# Altium PCB AVL_Sim908_Version 7.PcbDoc
Units mil, origin at the board's own origin, x right, y up, seen from the top; angles counter-clockwise.
Board outline 9740 x 4995 mil, 2 copper layers (Top Layer, Bottom Layer); 81 components, 0 nets, 314 pads, 110 vias.
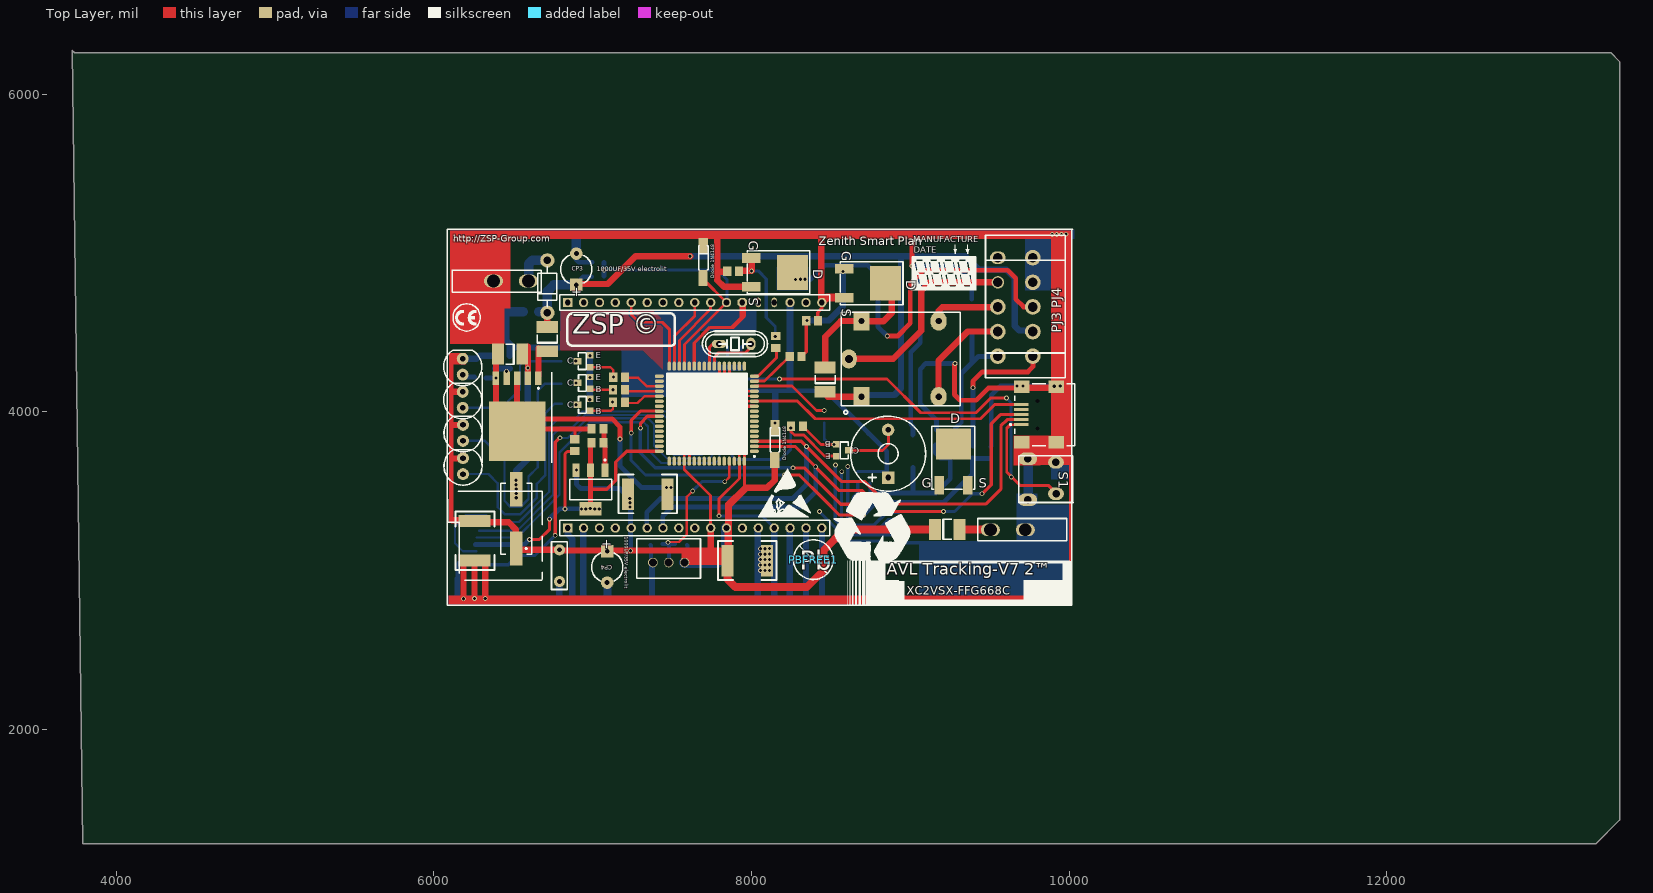
[diagram p0: Top Layer view]
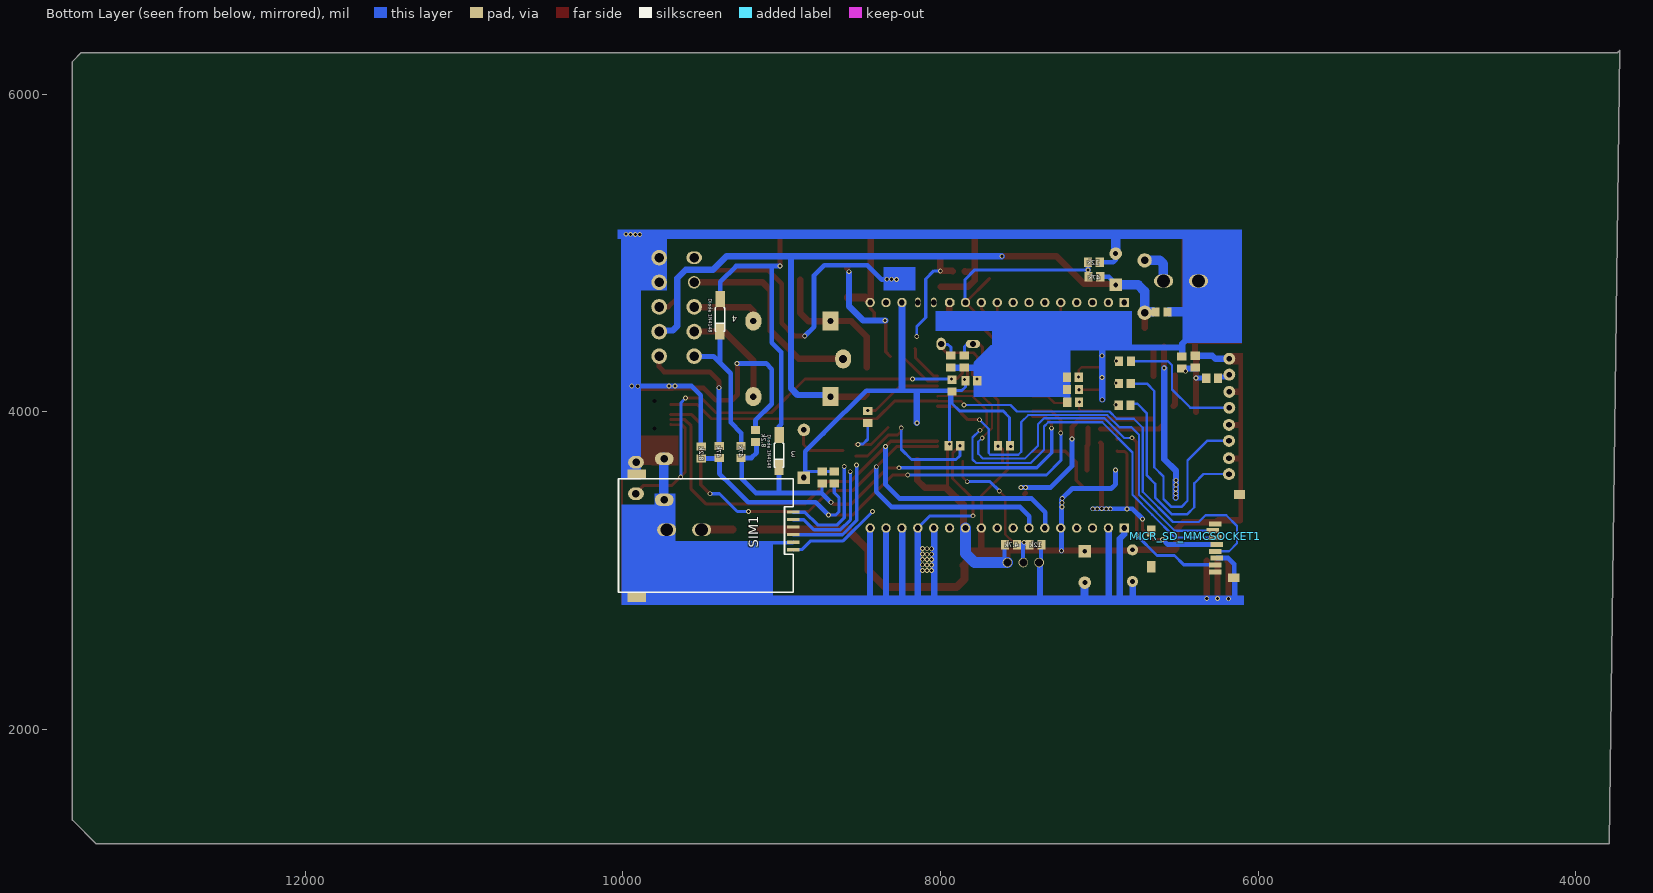
[diagram p1: Bottom Layer view, seen from below]

## Layer stack, top to bottom
Top Solder: solder mask 0.4, Solder Resist, Dk 3.5
Top Layer: signal copper 1.4
Dielectric1: dielectric 12.6, FR-4, Dk 4.8
Bottom Layer: signal copper 1.4
Bottom Solder: solder mask 0.4, Solder Resist, Dk 3.5

## Board outline
3725,6275 3740,6260 13410,6260 13465,6205 13465,1430 13315,1280 3790,1280

## Design rules (kind name [scope] priority, off if disabled: settings)
Clearance [All] p1: gap=10
PolygonConnect [All] p1: connectstyle=Relief reliefconductorwidth=10 reliefentries=4 polygonreliefangle="90 Angle" airgapwidth=10
RoutingVias [All] p1: holewidth=28 width=50 viastyle="Through Hole" minholewidth=28 minwidth=50 maxholewidth=28 maxwidth=50
SilkToSolderMaskClearance SilkscreenOverComponentPads [IsPad] p1: minsilkscreentomaskgap=10 clearancetoexposedcopper=TRUE
SolderMaskExpansion [All] p1: expansion=4
UnpouredPolygon [All] p1: allowunpoured=FALSE
Width [All] p1: maxlimit=10 minlimit=10 preferedwidth=10
28 further rules are at their usual default settings.

## Components (designator, comment, footprint, x,y, rotation, side; value= is the part's Value field where it differs from the comment)
3 "Diode 1N4148" D-SMD 9017,3726 r270 bottom (schematic designator D2)
4 "Diode 1N4148" D-SMD 9389,4581 r270 bottom (schematic designator D2)
CP3 "1000UF/35V electrolit" CAPPR5-5x5 6897,4897 r90 top (schematic designator CP2)
CP4 "1000UF/35V electrolit" CAPPR5-5x5 7092,3023 r270 top (schematic designator CP2)
D2 "Diode 1N4148" D-SMD 7697,4969 r90 top
D2 "Diode 1N4148" D-SMD 8148,3824 r90 top
MICR_SD_MMCSOCKET1 "" "PCBComponent_1 - duplicate" 6269,3295 r270 bottom locked
PBFREE1 "" LEAD_FREE_S 8389,3069 r0 top
PJ3 "PowerCon8" HDRB2*4#1 9771,4815 r270 top
PJ4 "PowerCon8" HDRB2*4#2 9771,4970 r270 top (schematic designator PJ3)
S1 "SW-PB" SW2 9917,3484 r270 top locked
SIM1 "SIMCard1" SIMCard1 8927,3368 r90 bottom locked
? "" DPAK 9181,3538 r0 top
? "Comment" 2012[0805] 6888,3790 r90 top
? "Comment" 2220 7472,3481 r180 top
? "Comment" 2012[0805] 7031,3892 r0 top
? "Comment" 2012[0805] 7030,3805 r0 top
? "Comment" SOT223 6987,3511 r180 top
? "Comment" 2012[0805] 9165,3848 r90 bottom
? "Comment" 2012[0805] 9256,3747 r90 bottom
? "Comment" 2012[0805] 9506,3743 r270 bottom
? "Comment" 2012[0805] 9392,3747 r270 bottom
? "Comment" 2012[0805] 8153,4440 r90 top
? "Comment" 2012[0805] 8287,3910 r0 top
? "Comment" SMD-tr 8534,3795 r180 top
? "Comment" 2012[0805] 8458,3967 r90 bottom
? "Comment" 1812 8463,4203 r90 top
? "Comment" 2012[0805] 8382,4572 r180 top
? "Comment" 2012[0805] 8278,4348 r0 top
? "Comment" 2012[0805] 6841,4042 r180 bottom
? "Comment" 2012[0805] 6840,4178 r180 bottom
? "Comment" 2012[0805] 6839,4318 r180 bottom
? "Comment" 2012[0805] 7165,4060 r180 bottom
? "Comment" 2012[0805] 7166,4140 r180 bottom
? "Comment" 2012[0805] 7167,4218 r180 bottom
? "Comment" SMD-tr 6986,4006 r0 top
? "Comment" SMD-tr 6986,4144 r0 top
? "Comment" SMD-tr 6985,4281 r0 top
? "Comment" 2012[0805] 7166,4060 r0 top
? "Comment" 2012[0805] 7166,4139 r0 top
? "Comment" 2012[0805] 7167,4217 r0 top
? "Comment" 2012[0805] 7035,4942 r180 bottom
? "Comment" 2012[0805] 7032,4850 r180 bottom
? "Comment" 2012[0805] 7556,3162 r0 bottom
? "Comment" 2012[0805] 7401.4,3162 r0 bottom
? "Comment" "mokhaberati 3pin" 7579,3051 r180 top
? "" DPAK 8584,4899 r270 top
? "Comment" 2012[0805] 7936,4316 r270 bottom
? "Comment" 2012[0805] 7850,4317 r270 bottom
? "Comment" X2P 7896,4427 r0 top
? "Comment" 2012[0805] 7928,4164 r270 bottom
? "Comment" 2012[0805] 7806,4196 r180 bottom
? "Comment" 2012[0805] 7600,3785 r180 bottom
? "Comment" 2012[0805] 7913,3787 r180 bottom
? "Comment" HC49/4H_SMX 6519,3326 r90 top
? "Comment" LM2576 6525,4045 r180 top
? "Comment" ATMEGA128 7739,3988 r180 top
? "Comment" LED1 6204,3827 r90 top
? "Comment" LED1 6204,3618 r90 top
? "Comment" LED1 6202,4035 r90 top
? "Comment" LED1 6202,4244 r90 top
? "Comment" HDR1X17#1 6843,3268 r0 top locked
? "Comment" HDR1X17#2 6843,4688 r0 top locked
? "Comment" buzzer 8860,3736 r90 top
? "Comment" Relay_2 9153,4065 r90 top
? "Comment" "Diode Zener" 6685,4793 r270 top
? "Comment" 2012[0805] 6609,4628 r0 bottom
? "Comment" 1812 6480,4363 r180 top
? "Comment" 2220 6256,3063 r90 top
? "Comment" MKT 6791,2931 r90 top
? "Comment" 2220 8098,3062 r180 top
? "Comment" 2012[0805] 6397,4315 r90 bottom
? "Comment" 2012[0805] 6482,4310 r90 bottom
? "Comment" 2012[0805] 6290,4210 r180 bottom
? "Comment" USB/SM0.8-6H5 10007,3982 r0 top locked
? "" DPAK 7998,4968 r270 top
? "Comment" 2012[0805] 7885,4884 r0 top
? "Comment" 2012[0805] 8744,3587 r270 bottom
? "Comment" 2012[0805] 8669,3587 r270 bottom
? "Comment" 1812 9232,3259 r0 top
? "Comment" 1812 6714,4458 r90 top

## Footprints (in the part's own frame and the unit in brackets; to place one, negate y for a bottom-side part, rotate by r counter-clockwise, add the part's x,y. Pads: shape width x height; smd on the part's side, far side on the other; paste and mask are expansions set on the pad)
1812 [mm] "Chip Capacitor; Body 4.5 x 3.2 mm (LxW typ)"
  rect 1.9x3.4 smd: 1(-1.95,0) 2(1.95,0)
  silkscreen extent -0.7,-1.6 0.7,1.6
2012[0805] [mm] "Chip Resistor; Body 2.0 x 1.3 mm (LxW typ)"
  rect 1.3x1.5 smd: 1(-0.95,0) 2(0.95,0)
2220 [mil]
  rect 75x200 smd: GND(0,0) VCC(250,0)
  silkscreen extent -60,-125 310,120
ATMEGA128 [mm] "mega128-64"
  oval 1.45x0.55 smd: 1PIN(-7.092,6) 2(-7.092,5.2) 3(-7.092,4.4) 4(-7.092,3.6) 5(-7.092,2.8) 6(-7.092,2) 7(-7.092,1.2) 8(-7.092,0.4) 9(-7.092,-0.4) 10(-7.092,-1.2) 12(-7.092,-2.8) 13(-7.092,-3.6) 14(-7.092,-4.4) 15(-7.092,-5.2) 16(-7.092,-6) 33(8.108,-6) 34(8.108,-5.2) 35(8.108,-4.4) 36(8.108,-3.6) 37(8.108,-2.8) 38(8.108,-2) 39(8.108,-1.2) 40(8.108,-0.4) 41(8.108,0.4) 42(8.108,1.2) 43(8.108,2) 44(8.108,2.8) 45(8.108,3.6) 46(8.108,4.4) 47(8.108,5.2) 48(8.108,6) CLK(-7.092,-2)
  oval 0.55x1.45 smd: 17(-5.492,-7.6) 18(-4.692,-7.6) 19(-3.892,-7.6) 20RST(-3.092,-7.6) 21VCC(-2.292,-7.6) 22GND(-1.492,-7.6) 23XTALL(-0.692,-7.6) 24XTALL(0.108,-7.6) 25(0.908,-7.6) 26(1.708,-7.6) 27(2.508,-7.6) 28(3.308,-7.6) 29(4.108,-7.6) 30(4.908,-7.6) 31(5.708,-7.6) 32(6.508,-7.6) 49(6.508,7.6) 50(5.708,7.6) 51(4.908,7.6) 52VCC(4.108,7.6) 53GND(3.308,7.6) 54(2.508,7.6) 55(1.708,7.6) 56(0.908,7.6) 57(0.108,7.6) 58(-0.692,7.6) 59(-1.492,7.6) 60(-2.292,7.6) 61(-3.092,7.6) 62AREF(-3.892,7.6) 63GND(-4.692,7.6) 64AVCC(-5.492,7.6)
  silkscreen extent -7.22,-6.45 6.96,6.95, body extent -6.49,-7 7.51,7, height 1.2
buzzer [mm]
  rect 2x2 hole 0.9: 6(-3.81,0)
  round 2 hole 0.9: 7(3.81,0)
  silkscreen extent -6,-6 6,6
CAPPR5-5x5 [mm] "Capacitor, Electrolytic, Radial; Body 5 x 5 mm (Dia.xH typ); Pin Spacing 5 mm (typ)"
  rect 2x2 hole 0.75: 1(-2.5,0)
  round 2 hole 0.8: 2(2.5,0)
  silkscreen extent -2.26,-2.5 2.27,2.5
D-SMD [mm]
  rect 2.54x1.5 smd: 1(-3.25,0.05) 2(1.905,0)
  silkscreen extent -1.91,-0.76 1.9,0.76
"Diode Zener" [mil]
  round 90 hole 47: A(-160,30) K(170,30)
  silkscreen extent -120,-30 130,90
DPAK [mil]
  rect 60x116 smd: 1(0,0) 3(180,0)
  rect 220x196 smd: 2(90,260)
  silkscreen extent -45,-25 225,370
HC49/4H_SMX [mm] "Quartz Crystal, SM; Body 13.4 (inc. leads) x 4.9 mm (LxW max)"
  rect 5.5x2 smd: 1(-4.75,0) 2(4.75,0)
  silkscreen extent -5.7,-2.45 5.7,2.45
HDR1X17#1 [mm] "Connector; Header; 17 Position"
  rect 1.5x1.5 hole 0.9: 1(0,0)
  round 1.5 hole 0.9: 2(2.54,0) 3(5.08,0) 4(7.62,0) 5(10.16,0) "6rx gsm"(12.7,0) "7 tx gsm"(15.24,0) 8(17.78,0) 9(20.32,0) 10(22.86,0) 11(25.4,0) 12(27.94,0) 13(30.48,0) 14(33.02,0) 15(35.56,0) 16(38.1,0) 17(40.64,0)
  silkscreen extent -1.27,-1.27 41.91,1.27
HDR1X17#2 [mm] "Connector; Header; 17 Position"
  rect 1.5x1.5 hole 0.9: 1(0,0)
  round 1.5 hole 0.9: 2(2.54,0) 3(5.08,0) 4(7.62,0) 5led(10.16,0) 6(12.7,0) 7(15.24,0) 8(17.78,0) 9ring(20.32,0) 10pwr(22.86,0) 11(25.4,0) 15vcc(35.56,0) 16(38.1,0) 17(40.64,0)
  oct 1.5x1.5 hole 0.9: 12rxgps(27.94,0)
  oval 0.889x1.524 hole 0.9: 13(30.48,0) 14(33.02,0)
  silkscreen extent -1.27,-1.27 41.91,1.27
HDRB2*4#1 [mil]
  round 98.43 hole 61: A-c5(465,0) A-c6(465,-220) ALARM(155,0) GND(0,0) R(155,-220) R(310,-220)
  round 78.42 hole 61: R(0,-220)
  oval 98.43x100.39 hole 61: VDD-12V(310,0)
  silkscreen extent -140,-298 600,203
HDRB2*4#2 [mil]
  round 98.43 hole 61: GND(0,0) R(310,-220) ""(155,0) ""(465,-220) ""(465,0)
  oval 78.42x98.43 hole 61: R(0,-220)
  round 78.42 hole 61: R(155,-220)
  oval 98.43x100.39 hole 61: ""(310,0)
  silkscreen extent -140,-298 600,203
LEAD_FREE_S [mil]
  silkscreen extent -125,-125 125,125
LED1 [mil]
  round 75 hole 35: 1(-10,20) 2(90,20)
  silkscreen extent -80,-100 144,140
LM2576 [mm]
  rect 1.05x2.1 smd: 1(-3.4,-4.225) 2(-1.7,-4.225) 3(0,-4.225) 4(1.7,-4.225) 5(3.4,-4.225)
  rect 9x9.5 smd: 6(0,4.225)
  silkscreen extent -5.55,-5.17 5.55,9.28
MKT [mil]
  round 70 hole 30: 1(0,0) 2(200,0)
  silkscreen extent -50,-50 250,50
"mokhaberati 3pin" [mil] "3pin"
  round 60 hole 50: 0(0,0) 1(100,0) 2(200,0)
  silkscreen extent -100,-150 300,100
"PCBComponent_1 - duplicate" [mm]
  rect 0.8x2 smd: 1(0,0) 2(1.1,-0.4) 3(2.2,0) 4(3.3,0.2) 5(4.4,0) 6(5.5,0.2) 7(6.6,0) 8(7.7,0)
  rect 1.4x1.9 smd: 9(8.643,2.918)
  rect 1.8x1.4 smd: 10(6.865,-10.29) 11(1.15,-10.29)
  rect 1.4x1.75 smd: 12(-4.692,3.807)
Relay_2 [mil]
  rect 120x100 hole 40: 1(30,460) 4(506,460)
  oval 120x100 hole 40: 2(30,-25) 3(506,-25)
  oval 120x100 hole 50: 5(268,540)
  silkscreen extent -80,-160 562,588
SIMCard1 [mm]
  rect 1.524x3 smd: 0(-13.589,25.019) 0(6.096,25.019)
  rect 0.5x2 smd: 1(SIM-VCC)(-6,0) 2(SIM_RST)(-3.6,0) 3(SIM_CLK)(-1.2,0) 4(GND)(-4.8,0) 5(-2.4,0) 6(SIM_DATA)(0,0)
  silkscreen extent -12.83,0 5.33,27.94
SMD-tr [mil]
  rect 40x40 smd: 1(0,0) 2(0,75)
  rect 50x40 smd: 3(-80,38)
  silkscreen extent -75,-15 -25,90
SOT223 [mm] "SOT-223/SC-73; 4 Leads; Body 6.7 x 7.3 mm, inc. leads (LxW max)"
  rect 1.1x2.15 smd: 1adj(-2.3,-3.1) 2(0,-3.1) 3In(2.3,-3.1)
  rect 3.5x2.15 smd: 4(0,3.1)
  silkscreen extent -3.35,-4.85 3.35,1.63
SW2 [mm]
  oval 2x2.5 hole 1.2: 1(0,0) 2(-5.029,-0.001)
  oval 2x3 hole 1.2: 3(0.991,-4.522) 4(-5.588,-4.522)
  round 0 all layers, no hole: 8(-4.648,-5.562) 9(-0.457,-5.638)
  silkscreen extent -6.07,-5.94 1.4,2.72
USB/SM0.8-6H5 [mm] "Connector; USB2.0, Type B, SM; 5 Position; Right Angle"
  rect 2.3x0.5 smd: 1rst(-7.85,-1.6) 2miso(-7.85,-0.8) 3mosi(-7.85,0) 4(-7.85,0.8) 5clk(-7.85,1.6)
  rect 2.5x2 smd: 6(-7.75,4.45) 7(-2.25,4.45) 8(-7.75,-4.45) 9(-2.25,-4.45)
  round 0.346 hole 0.646 unplated: MH1(-5.25,2.2) MH2(-5.25,-2.2)
  silkscreen extent -9.67,-4.95 0.7,4.95
X2P [mm]
  oval 2.3x1.3 hole 1: 1(-2.54,0)
  oval 1.5x2 hole 1: 2(2.54,0)
  silkscreen extent -5.21,-2.03 5.21,2.03

## Part data
3 4 D2 D2: "High Conductance Fast Diode"
CP3 CP4: library part "Cap Pol3", "Polarized Capacitor (Surface Mount)"
MICR_SD_MMCSOCKET1: library part "Header 12", "Header, 12-Pin"
S1: "Switch"

## Free pads (board coordinates)
  oval 120x80 hole 80: 3(6376,4823) 3(6596,4823) 3(9504,3257) 3(9724,3257)

## Via types
v1: diameter 30, hole 19.68, Top Layer to Bottom Layer, 56 vias
v2: diameter 30, hole 19.68, Top Layer to Bottom Layer, tented both sides, 54 vias

## Nets (pads, with @x,y where several pads share a name; then routed paths per layer and width w, separated by ;. In a path a pad name is that pad's centre, name@x,y a point inside that pad or via, vN(x,y) a via of type N, cw(c..) or ccw(c..) an arc to the next point about the centre after c; other vN are vias at no path point)
pads on no net: 3.1 3.2 4.1 4.2 "?.6rx gsm" "?.7 tx gsm" ?.0 ?.1 ?.1adj ?.1PIN ?.1rst ?.2 ?.2miso ?.3 ?.3In ?.3mosi ?.4 ?.5 ?.5clk ?.5led ?.6 ?.7 ?.8 ?.9 ?.9ring ?.10 ?.10pwr ?.11 ?.12 ?.12rxgps ?.13 ?.14 ?.15 ?.15vcc ?.16 ?.17 ?.18 ?.19 ?.20RST ?.21VCC ?.22GND ?.23XTALL ?.24XTALL ?.25 ?.26 ?.27 ?.28 ?.29 ?.30 ?.31 ?.32 ?.33 ?.34 ?.35 ?.36 ?.37 ?.38 ?.39 ?.40 ?.41 ?.42 ?.43 ?.44 ?.45 ?.46 ?.47 ?.48 ?.49 ?.50 ?.51 ?.52VCC ?.53GND ?.54 ?.55 ?.56 ?.57 ?.58 ?.59 ?.60 ?.61 ?.62AREF ?.63GND ?.64AVCC ?.A ?.CLK ?.GND ?.K ?.MH1 ?.MH2 ?.VCC CP3.1 CP3.2 CP4.1 CP4.2 D2.1 D2.2 MICR_SD_MMCSOCKET1.1 MICR_SD_MMCSOCKET1.2 MICR_SD_MMCSOCKET1.3 MICR_SD_MMCSOCKET1.4 MICR_SD_MMCSOCKET1.5 MICR_SD_MMCSOCKET1.6 MICR_SD_MMCSOCKET1.7 MICR_SD_MMCSOCKET1.8 MICR_SD_MMCSOCKET1.9 MICR_SD_MMCSOCKET1.10 MICR_SD_MMCSOCKET1.11 MICR_SD_MMCSOCKET1.12 PJ3.A-c5 PJ3.A-c6 PJ3.ALARM PJ3.GND PJ3.R PJ3.VDD-12V PJ4. PJ4.GND PJ4.R S1.1 S1.2 S1.3 S1.4 S1.8 S1.9 SIM1.0 SIM1.1(SIM-VCC) SIM1.2(SIM_RST) SIM1.3(SIM_CLK) SIM1.4(GND) SIM1.5 SIM1.6(SIM_DATA)
copper on no net: | length 95237.9
  Top Layer w14: v2@7731,3839 7731,3842 7676,3897 7676,4039 7724,4087 7766,4129 8018.94,4129 ; v2@7747,3883 7709,3921 7709,4009 7733,4033 7800,4100 8016.45,4100 8018.21,4098.24 ; v2@7850,4047 7869.74,4066.74 8018.21,4066.74
  Top Layer w15: 6985,4281 7111,4281 7129.6,4262.4 v1@7129.6,4217 ; 6986,4006 7116,4006 7128,4018 7128,4058.6 v1@7126.6,4060 ; 6986,4144 6991,4139 v1@7128.6,4139 ; 7199.73,4129.73 7419.79,4129.73 ; 7201.4,4060 7206.4,4055 7283,4055 7326.24,4098.24 7419.79,4098.24 ; 7204.4,4217 7207.4,4214 7286,4214 7338.77,4161.23 7419.79,4161.23 7418.02,4163 ; v2(7474,3178) 7476,3180 7544,3180 7592,3228 7592,3464 v2(7630,3502) ; v2(7832,3560) 7860.73,3588.73 7860.73,3688.79
  Top Layer w18: 7243,4688 7243,4613 7292,4564 7438,4564 7482.78,4519.22 7482.78,4287.21 ; 7514.28,4287.21 7516,4288.94 7516,4476 7643,4603 7643,4688 ; 7545.77,4287.21 7546,4287.44 7546,4449 7743,4646 7743,4688 ; v2@7559,3782 7577,3764 7577,3689.05 ; 7577.27,3688.79 7577,3689.05 ; 7577.27,4287.21 7577,4287.48 7578,4288.48 7578,4423 7843,4688 ; 7608.76,3688.79 7609,3689.02 7609,3766 7626,3783 v2(7637,3783) 7637,4072 v2@7773,4208 ; 7734.75,4287.21 7735,4287.46 7735,4406 7756,4427 7796,4427 ; 7743,3268 7742,3269 7742,3472 7577,3637 7577,3689.05 ; 7766.24,4287.21 7766.24,4345.24 7793,4372 7962,4372 7996,4406 7996,4427 ; v2@7770,4205 7797.74,4232.74 7797.74,4287.21 ; v2(7796,3345) 7796,3453 7923.72,3580.72 7923.72,3688.79 7923,3689.51 7923,3741 v2(7878,3786) ; 7829.24,4287.21 7829.24,4221.76 v2@7847,4204 ; 7860.73,4287.21 7860.73,4243.27 7863,4241 7895,4209 v2@7929,4209 ; 7903,5103 7908,5108 ; v2(7944,3798) 7944,3770 7956,3758 7956,3688.01 ; 8018.21,4066.74 8290.26,4066.74 8401,3956 9442,3956 9530.99,4044.99 9697.94,4044.99 ; 8018.21,4161.23 8255.77,4161.23 8409,4008 v2(8458,4008) ; 8018.21,4192.72 8082.72,4192.72 8158,4268 8232,4342 ; 8018.21,4224.22 8042.22,4224.22 8121,4303 8158,4340 8158,4394.6 8161,4397.6 ; 8049,5103 8062,5116 ; v2(8177,4207) 8853,4207 9066,3994 9414,3994 9506,4086 v2(9605,4086) ; v1@8249.6,3910 8249.6,3874.4 8271,3853 8329,3853 8460,3722 8532,3722 8534,3720 ; 8330,3902 8437,3795 v2@8534,3795 ; 8614,3757 8825,3757 8863,3795 8863,3898 ; 9697.45,3951 9697.94,3950.5 ; 9697.94,3919.01 9696.94,3918 9629,3918 9607,3896 9607,3621 9691,3537 9868,3537 9926,3479 ; 9769,4503 9771,4505 ; 8018.21,4129.73 8018.94,4129 8018.21,4129.73
  Top Layer w20: v2(6603,3196) 6664,3196 6729,3261 v2(6729,3324) ; v2(6765,3222) 6765,3809 v2@6793,3837 ; v2(6826,3388) 6826,3735 6841,3750 6885.4,3750 6888,3752.6 ; 6888,3827.4 6889,3828.4 6889,3888 ; 6991,3511 6992,3512 7089,3512 7146,3569 7146,3684 7213.78,3751.78 7419.79,3751.78 ; v2(7243,3867) 7243,3946 7301,4004 7419.54,4004 7419.79,4003.75 ; v2(7302,3897) 7302,3929 7345,3972 7345.25,3972.25 7419.79,3972.25 ; 7640.26,4287.21 7640.26,4433.26 7738,4531 7876,4531 7943,4598 7943,4688 ; 7692.49,4838.51 7843,4688 ; v2@7756,3951 7828,3951 7912,4035 8017.97,4035 8018.21,4035.24 ; 7842,3267 7842,3419 7956,3533 7956,3688.01 7955.22,3688.79 ; 7859,4531 7885,4531 7956,4602 7956,4676 ; 7934,4594 7934,4668 ; v2(8001,4887) 8001,4961 8006,4966 ; 8018.21,3783.28 8019.49,3782 8274,3782 8552,3504 8699,3504 8831,3372 v2(9209,3372) ; 8018.21,3814.77 8018.44,3815 8313,3815 8566,3562 8710,3562 8852,3420 9477,3420 9570,3513 9570,3911 9610,3951 9697.45,3951 ; v2@8206,3601 8302,3601 8451,3452 8553,3350 v2(8705,3350) ; v2(8261,3647) 8333,3647 8498,3482 8562,3418 8676,3418 v2@8689,3431 ; 8315.4,4348 8344.6,4377.2 v1@8344.6,4572 ; 8419.4,4572 8417,4574.4 8417,4625 8443,4651 8443,4688 ; v2@9451.5,3483.5 9509,3541 9509,3924 9567,3982 9698.95,3982
  Top Layer w30: 6149,3312 6162,3312 ; 6603,3914 6625,3892 6924,3892 6993.6,3892 ; 6666,3955 7122,3955 7172,3905 v2@7172,3829 ; v1@6987,3388.95 6987,3633.05 6987,3799.4 6992.6,3805 ; 7071,3898.4 7071,3793 7077.55,3786.45 7077.55,3633.05 ; 7465,3488 7472,3481 ; v2(8855,4477) 8920,4477 9000,4557 9000,4806 9085,4891 9613,4891 9664,4840 9664,4709 9713,4660 9771,4660 ; v2(9010,4917) 9010,5098 9027,5115 9068,5115 ; v2@9278,4298 9278,4107 9312,4073 9414,4073 9490,4149 9815,4149 9817,4151 9917,4151 9921,4147 ; v2(9394,4151) 9394,4192 9453,4251 9740,4251 9772,4283 9772,4360
  Top Layer w38: 6386,4328 6391.14,4322.86 v2@6391.14,4211.34 ; 6391,3998 6391,4227.2 v2@6391.14,4227.34 ; 6398,4686 6398,4366 6408,4356 ; 6525,4227.34 6525,4045 6533,4037 ; 6591.93,4227.34 6591.93,4411
  Top Layer w40: 6115,3317 6252,3317 6260.5,3308.5 ; 6121,4125 6157,4125 ; 6123,3706 6157,3706 6159,3708 ; 6125,3917 6159,3917 ; v2@6187,2821 6187,3055 6191,3059 ; v2(6256,2824) 6256,3064 ; 6256,3313 6265,3304 6471,3304 6516,3259 6516,3141.99 6519,3138.99 ; v2(6324,2825) 6324,3063 ; 6523,3132 6790,3132 ; 6596,4823 6628,4823 ; 6658.86,4227.34 6658.86,4399 ; 6715,4529 6715,4623 ; 6791,3131 6790,3132 ; 6897,4798.57 6902.43,4804 7095,4804 7270,4979 7429,4979 v2(7614,4979) ; 7582,3125 7579,3122 7579,3051 7583,3055 7841,3055 ; 7600,3127 7842,3127 ; 7743,3268 7743,3127 6795,3127 6790,3132 ; 7784,5107 7784,4829 7827,4786 7996,4786 7998,4788 ; 7795,4882 7845.6,4882 7847.6,4884 ; 7856,3281 7856,3408 7970,3522 8098,3522 8146.03,3570.03 8146.03,3696.05 ; 7922.4,4884 7925.4,4887 v2(8001,4887) 8001,4961 ; 8439,5107 8439,4692 8443,4688 ; 8463,4126.23 8463,4113 8481,4095 8693,4095 ; 8463,4279.77 8464,4280.77 8464,4473 8562,4571 8693,4571 8694,4570 8831,4570 8883,4622 8883,4831 ; 8588,4908 8589,4907 ; 8613,4333 8892,4333 9069,4510 9069,4763 9121,4815 9551,4815 ; 9178,4095 9177,4096 9177,4321 9361,4505 9551,4505 ; 9178,4571 9178,4636 9201,4659 9222,4659 9539,4659 9546,4666 ; 9472,3257 9504,3257 ; 9686.88,4150.2 v1@9903.42,4150.2
  Top Layer w50: 7855,3031 7849,3025 7849,2946 7899,2896 8348,2896 8455,3003 8455,3128 8586,3259 9155.23,3259 ; 8443,4688 8474,4719 8584,4719 ; 9308.77,3259 9502,3259 9504,3257
  Bottom Layer w14: 6261.05,3165 6261.13,3165.08 ; 6269,3035.16 6270.84,3037 ; 6269,3121.77 6183.23,3121.77 6133,3172 6133,3281 6201,3349 6332,3349 6375,3306 6536,3306 6727,3497 6727,3899 6784,3956 6890,3956 6936,4002 7518,4002 7559,4043 v2(7852,4043) ; 6269,3208.39 6523.39,3208.39 6667,3352 6792,3477 6792,3744 6982,3934 7322,3934 7348,3908 7348,3761 7432,3677 7775,3677 7798,3700 7798,3838 v2(7752,3884) ; 6284.75,3251.69 6524.69,3251.69 6751,3478 6751,3855 6798,3902 6873,3902 6950,3979 7448,3979 7492,3935 7492,3748 7510,3730 7687,3730 7697,3740 7697,3808 7696,3809 7696,3892 v2(7754,3950) ; v2@6794,3835 6844,3835 6968,3959 7349,3959 7387,3921 7387,3787 7469,3705 7732,3705 7762,3735 7762,3811 v2(7738,3835)
  Bottom Layer w15: 6157,4025 6427,4025 6543,4141 6543,4293 6568,4318 6801.6,4318 ; 6159,3608 6344,3608 6403,3549 6403,3399 6446,3356 6545,3356 6649,3460 6649,3547 6701,3599 6701,3990 6761,4050 6805,4050 ; 6159,3817 6322,3817 6445,3694 6445,3440 6484,3401 6546,3401 6596,3451 6596,3593 6654,3651 6654,4130 6701,4177 6801.6,4177 6802.6,4178 ; 6897,4798.57 6916,4817.57 6916,4826 ; 6897,4995.43 6898,4994.43 ; 7069.4,4850 7072.4,4853 ; 7843,4688 7845,4690
  Bottom Layer w18: v2(7558,3782) 7565,3789 7565,3964 7607,4006 7881,4006 7928,4053 7928,4133.6 7866.4,4133.6 7843.4,4156.6 v2@7843.4,4202 ; 7650,3794 7654,3798 ; 7796,4427 7834,4427 7850,4411 7850,4354.4 ; v2@7802,3343 7900,3343 8068,3343 8143,3268 ; v2(7878,3786) 7878,3723 7902,3699 8182,3699 8247,3764 v1@8247,3905 ; v2(7930,4207) v2(8177,4207) ; 7935.4,4278 7936,4278.6 ; 7936,4353.4 7935,4354.4 7935,4406 7953,4424 7993,4424 7996,4427 ; 7940,4133 7936,4137 7944,4129 v2(7944,3798) ; 8093,4593 8150,4536 v1(8150,4474.4) ; 8243,4515 8248,4520 ; 8458,3929.6 8458,3827 8488,3797 v2@8518,3797 ; v2(8458,4008) v2@8460,4006 ; v2(9605,4086) 9634,4057 9634,3590 v2(9635,3590)
  Bottom Layer w20: 6141,2815 6141,2952 6144,2955 ; 6270.84,3037 6469,3037 6527,3095 6637,3095 v2@6764.5,3222.5 ; v2(7071,4893) 7785,4893 7845,4833 7845,4690 ; v2@7242,3867 7242,3693 7333,3602 v2(8206,3602) ; v2@7300,3897 7300,3741 7393,3648 8103,3648 v2@8262,3648 ; v2(7630,3502) 7689,3561 v2@7831,3561 ; v2(8001,4887) 8042,4887 8093,4836 8093,4593 ; v2@8428.5,3371.5 8613,3187 8818,3187 8873,3132 8926.78,3132 8927,3131.78 ; v2@8527,3666 8527,3316 8617,3226 8926.73,3226 8927,3226.27 ; v2@8566,3622 8566,3321 8630,3257 8797,3257 8860.76,3320.76 8927,3320.76 ; v2(8606,3656) 8606,3332 8650,3288 8774,3288 8854,3368 8927,3368 ; 8669,3549.6 8669,3490 8640,3461 8640,3369 8659,3350 v2(8705,3350) ; 8669,3624.4 8744,3624.4 8846,3624.4 ; 8744,3549.6 8747,3546.6 8747,3488 ; 8927,3179.02 8930.02,3176 9150,3176 9218,3108 9218,2804 ; v2(9209,3372) 9279,3372 9391,3484 v2(9451,3484) ; 9738.97,3444.98 9741,3447.02
  Bottom Layer w25: 7364,3162 7368,3158 7368,3062 7379,3051 ; 7438.8,3167 7518.6,3167 ; 7479,3051 7480,3052 7480,3164 ; 7579,3051 7597,3069 7597,3158.4 7593.4,3162
  Bottom Layer w30: 6151,2828 6151,3041 6189,3079 6260.59,3079 6261.13,3078.46 ; 6180,4219 6256.6,4219 ; 6261.13,3165.08 6262.2,3164 6570,3164 v2@6602.5,3196.5 ; 6327.4,4213 v2(6392,4213) ; v2@6728.5,3325.5 6792,3389 v1@7044,3389 ; v1(6898,3634) 6898,3544 6925,3517 7170,3517 7239,3448 v2@7239,3124 ; 6898,4994.43 6898,4956 6912,4942 6997.6,4942 ; 6916,4826 6940,4850 6994.6,4850 ; 7072.4,4853 7072.4,4942 ; v2(7173,3829) 7173,3657 7306,3524 v1@7494,3524 ; 7343,3268 7341,3270 7341,3368 7427,3454 8258,3454 8346,3542 v2(8346,3782) ; 7443,3268 7441,3270 7441,3342 7500,3401 8309,3401 8404,3496 v2(8404,3654) ; 7940,4133 8226,4133 ; 8208,4133 8468,4133 8737,3864 8851,3750 8851,3606 ; 8245,4832 8369,4832 8460,4923 8731,4923 8796,4858 8796,4536 v2(8855,4477) ; v2(8689.5,3430.5) 8747,3488 9161,3488 9251,3578 9251,3709.6 9190.4,3709.6 9158,3742 9158,3792 ; v2(8705,3350) 8785,3430 9211,3430 9314,3533 9392,3611 9392,3709.6 ; v2(9010,4917) 9287,4917 9386,4818 9386,4709.98 9387.03,4708.95 ; 9015.03,3853.95 9016,3854.92 9016,3909 9003,3922 9003,4376 9063,4436 9063,4914 ; 9017,3496 9017,3651 ; 9165,3885.4 9165,3946 9062,4049 9062,4268 9098,4304 v2(9281,4304) ; 9254,3792 9254,3866 9321,3933 9321,4241 9428,4348 9549,4348 9551,4350 ; 9389,4312 9389,4506 ; v2(9394,4151) 9395,4150 9395,3785 ; 9506,3705.6 9396,3705.6 ; 9506,3780.4 9509,3783.4 9509,4104 9567,4162 v1@9945,4162 ; 9764,4512 9771,4505 ; 9392,3709.6 9396,3705.6 ; 9392,3709.6 9396,3705.6
  Bottom Layer w40: 6182,4334 6269,4334 6288.4,4353.4 6396,4353.4 ; 6387,4272.6 6478,4272.6 ; 6418,4489 6478,4429 6478,4352.4 ; 6480,4405 7670,4405 7771,4304 v2(7771,4206) ; v1(6518,3569) 6518,3628 6592,3702 v2(6592,4275) ; v1(6519,3459) v1@6519,3568 ; 6789,2810 6789,2929 6791,2931 ; 6843,3268 6843,3229 6871,3201 6871,2818 6866,2813 ; 6942,2819 6942,3267 6943,3268 ; v1@6982,4077 6982,4404 ; 7194,4400 7202.4,4391.6 7202.4,4060 ; 7374,2826 7374,3046 7379,3051 ; v2@7614,4978 8941,4978 8941,4147 8900,4106 8704,4106 8693,4095 ; 7775,4278 7935.4,4278 ; 8039,2813 8039,3264 8043,3268 ; 8143,2824 8143,3268 ; v1@8150,3931 8150,4127 ; 8242,2823 8242,3267 8243,3268 ; 8342,2821 8343,2822 8343,3268 ; v1@8346,4575 8487,4575 8576,4664 v1@8576,4871 ; 8439,5115 8443,5111 ; 8443,3268 8444,3267 8444,2832 ; 8603,4978 9347,4978 9432,4893 9604,4893 9657,4840 9657,4717 9657,4540 9685,4512 9764,4512
  Bottom Layer w45: 8243,4150 8243,4688
  Bottom Layer w50: 7084,2919 7093,2910 7093,2816
  Bottom Layer w60: 6471.39,4630.15 6472.54,4629 6563,4629 ; 6596,4823 6597,4824 ; 6597.37,4827 6597.37,4931.37 6619,4953 6715,4953 ; 6661,4629 6709,4629 6715,4623 ; 6714,4622 6715,4623 ; 6897,4798.57 6755.57,4798.57 6715,4758 6715,4623 ; 6897,4995.43 6898,4996.43 6898,5109 ; 9503,3256 9504,3257 ; 9741,3447.02 9741,3713
  Bottom Layer w70: 7579,3051 7580,3052 7786,3052 7843,3109 7843,3268
  other v1: 8057,3000 8085,3000 8112.99,3001 8057,3036 8085,3036 8112.99,3037 8057,3070 8085,3070 8112.99,3071 8057,3103 8085,3103 8112.99,3104 8057,3138 8085,3138 8112.99,3139 6931,3389 6957,3389 7013,3389 7042,3389 6985,3390 7235,3401 7235,3427 7234,3455 6519,3486 6519,3513.01 7464,3523 7494,3523 6518,3541 8247,3899 8148,3929 6895.4,4044 7126,4061 6982,4076 7129,4139 9906,4161 9671,4163 9709,4163 9944,4163 6894.4,4180 6984,4215 7131,4220 6893.4,4320 6984,4353 8350,4574 8277,4833 8308,4834 8338,4834 8576,4882 9893,5116 9921,5116 9951,5117 9980,5118
  other v2: 6187,2823 7239,3125 8428,3372 8568,3623 8529,3665 8520,3794 6794,3836 7848,4203 6457,4255

## Polygon pours and split planes (outlines as drawn)
no net on Top Layer "Top Layer-No Net" (solid, pour order 2): 6799,4637 6802,4634 7386,4634 7442,4578 7442,4262 7317,4387 6796,4387

## Other copper
Top Layer:
  rectangle: 7830,3090 7876,3298
  rectangle: 6102,4428 6444,4651
  rectangle: 6102,4651 6482,5142
  rectangle: 9885,3750 10011,5141
  rectangle: 6097,3305 6123,4371
  rectangle: 6101,4298 6203,4371
  rectangle: 9813,3664 10009,3760
  rectangle: 9651,3758 9998,3850
  rectangle: 9651,3663 9820,3815
  rectangle: 10000,2788 10011,3759
  rectangle: 6092,2788 10011,2842
  rectangle: 6104,5088 10008,5142
  rectangle: 7579,3070 7845,3122
Bottom Layer:
  rectangle: 7672,4507 8033,4634
  rectangle: 7699,4286 7749,4331
  rectangle: 7638,4343 7693,4398
  rectangle: 7560,4244 7730,4362
  rectangle: 7219,4255 7656,4434
  rectangle: 7201,4094 7792,4298
  rectangle: 6794,4405 7676,4634
  rectangle: 9053,2784 10008,3186
  rectangle: 9887,3573 10012,4776
  rectangle: 9723,4762 10011,5146
  rectangle: 6102,5088 10035,5146
  rectangle: 6088,2784 10009,2842
  rectangle: 6103,4432 6476,5112
  rectangle: 8158,4764 8359,4911
  rectangle: 9669,3186 10008,3417
  rectangle: 9669,3335 9801,3485

## Silkscreen, mask and mechanical layers (free items; w line width, h text height)
Top Overlay:
  drawing of 11460 lines, arcs and shapes, not listed
  text "MANUFACTURE" at 9019.48,5066.36 h40
  text "http://ZSP-Group.com" at 6122,5056 h70
  text "Zenith Smart Plan" at 8425,5028 h90
  text "DATE" at 9020.58,4999.56 h40
  text "ZSP ©" at 6872,4450 h212.6
  text "AVL Tracking-V7 2™" at 8851,2949 h125.98
  text "XC2VSX-FFG668C" at 8979,2829 h92.36
Bottom Overlay:
  text "12k" at 7002,4926 h30
  text "47k" at 6994,4831 h30
  text "8.2k" at 9124,3775 h30 r90
  text "47k" at 9271,3715 h30 r90
  text "47k" at 9408,3711 h30 r90
  text "8.2k" at 9520,3693 h30 r90
  text "12k" at 7364,3148 h30
  text "4.7k" at 7508,3148 h30

## Text inside footprints (layer, text, board x,y; h text height)
CP3: Top Overlay "+" at 6926.53,4717.87 h59.06 r90
CP4: Top Overlay "+" at 7062.47,3202.13 h59.06 r270
PBFREE1: Top Overlay "Pb" at 8304,3004 h120
?: Top Overlay "S" at 9431,3523 h60; Top Overlay "G" at 9071,3523 h60; Top Overlay "D" at 9251,3928 h60
?: Top Overlay "C" at 8679,3775 h40 r180; Top Overlay "E" at 8499,3740 h40 r180; Top Overlay "B" at 8499,3815 h40 r180
?: Top Overlay "C" at 6841,4026 h40; Top Overlay "E" at 7021,4061 h40; Top Overlay "B" at 7021,3986 h40
?: Top Overlay "C" at 6841,4164 h40; Top Overlay "E" at 7021,4199 h40; Top Overlay "B" at 7021,4124 h40
?: Top Overlay "C" at 6840,4301 h40; Top Overlay "E" at 7020,4336 h40; Top Overlay "B" at 7020,4261 h40
?: Top Overlay "S" at 8569,4649 h60 r270; Top Overlay "G" at 8569,5009 h60 r270; Top Overlay "D" at 8974,4829 h60 r270
?: Top Overlay "S" at 7983,4718 h60 r270; Top Overlay "G" at 7983,5078 h60 r270; Top Overlay "D" at 8388,4898 h60 r270
?: Mechanical 1 "PCB Edge" at 10024.02,3823.09 h9.84 r90